# Altium PCB smd.PcbDoc
Units mm, origin at the board's own origin, x right, y up, seen from the top; angles counter-clockwise.
Board outline 50.04 x 50.04 mm, 2 copper layers (Top Layer, Bottom Layer); 16 components, 12 nets, 41 pads, 4 vias.
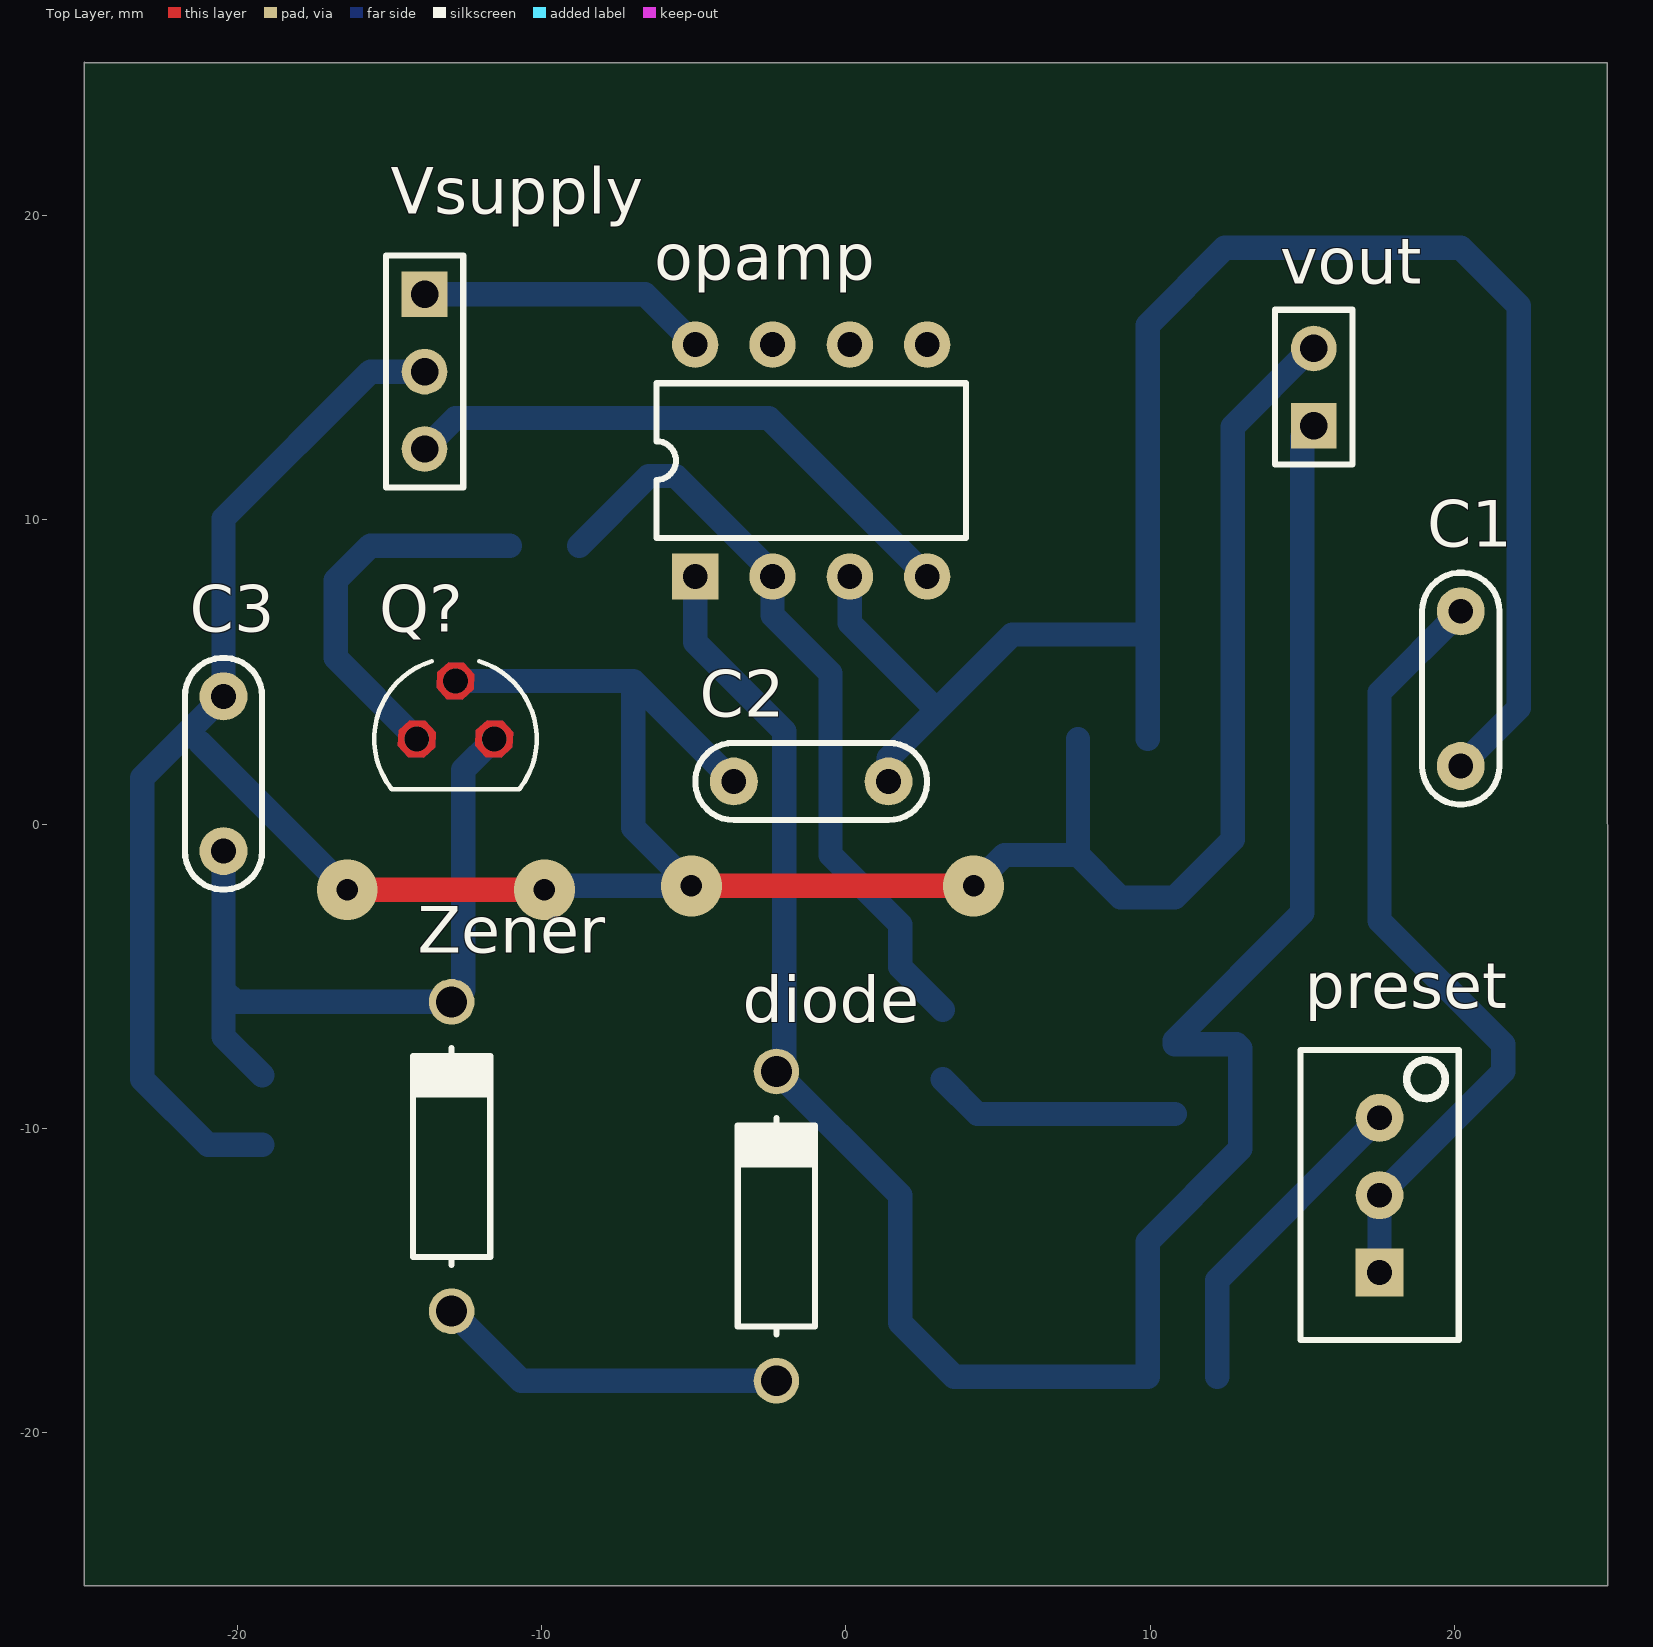
[diagram p0: Top Layer view]
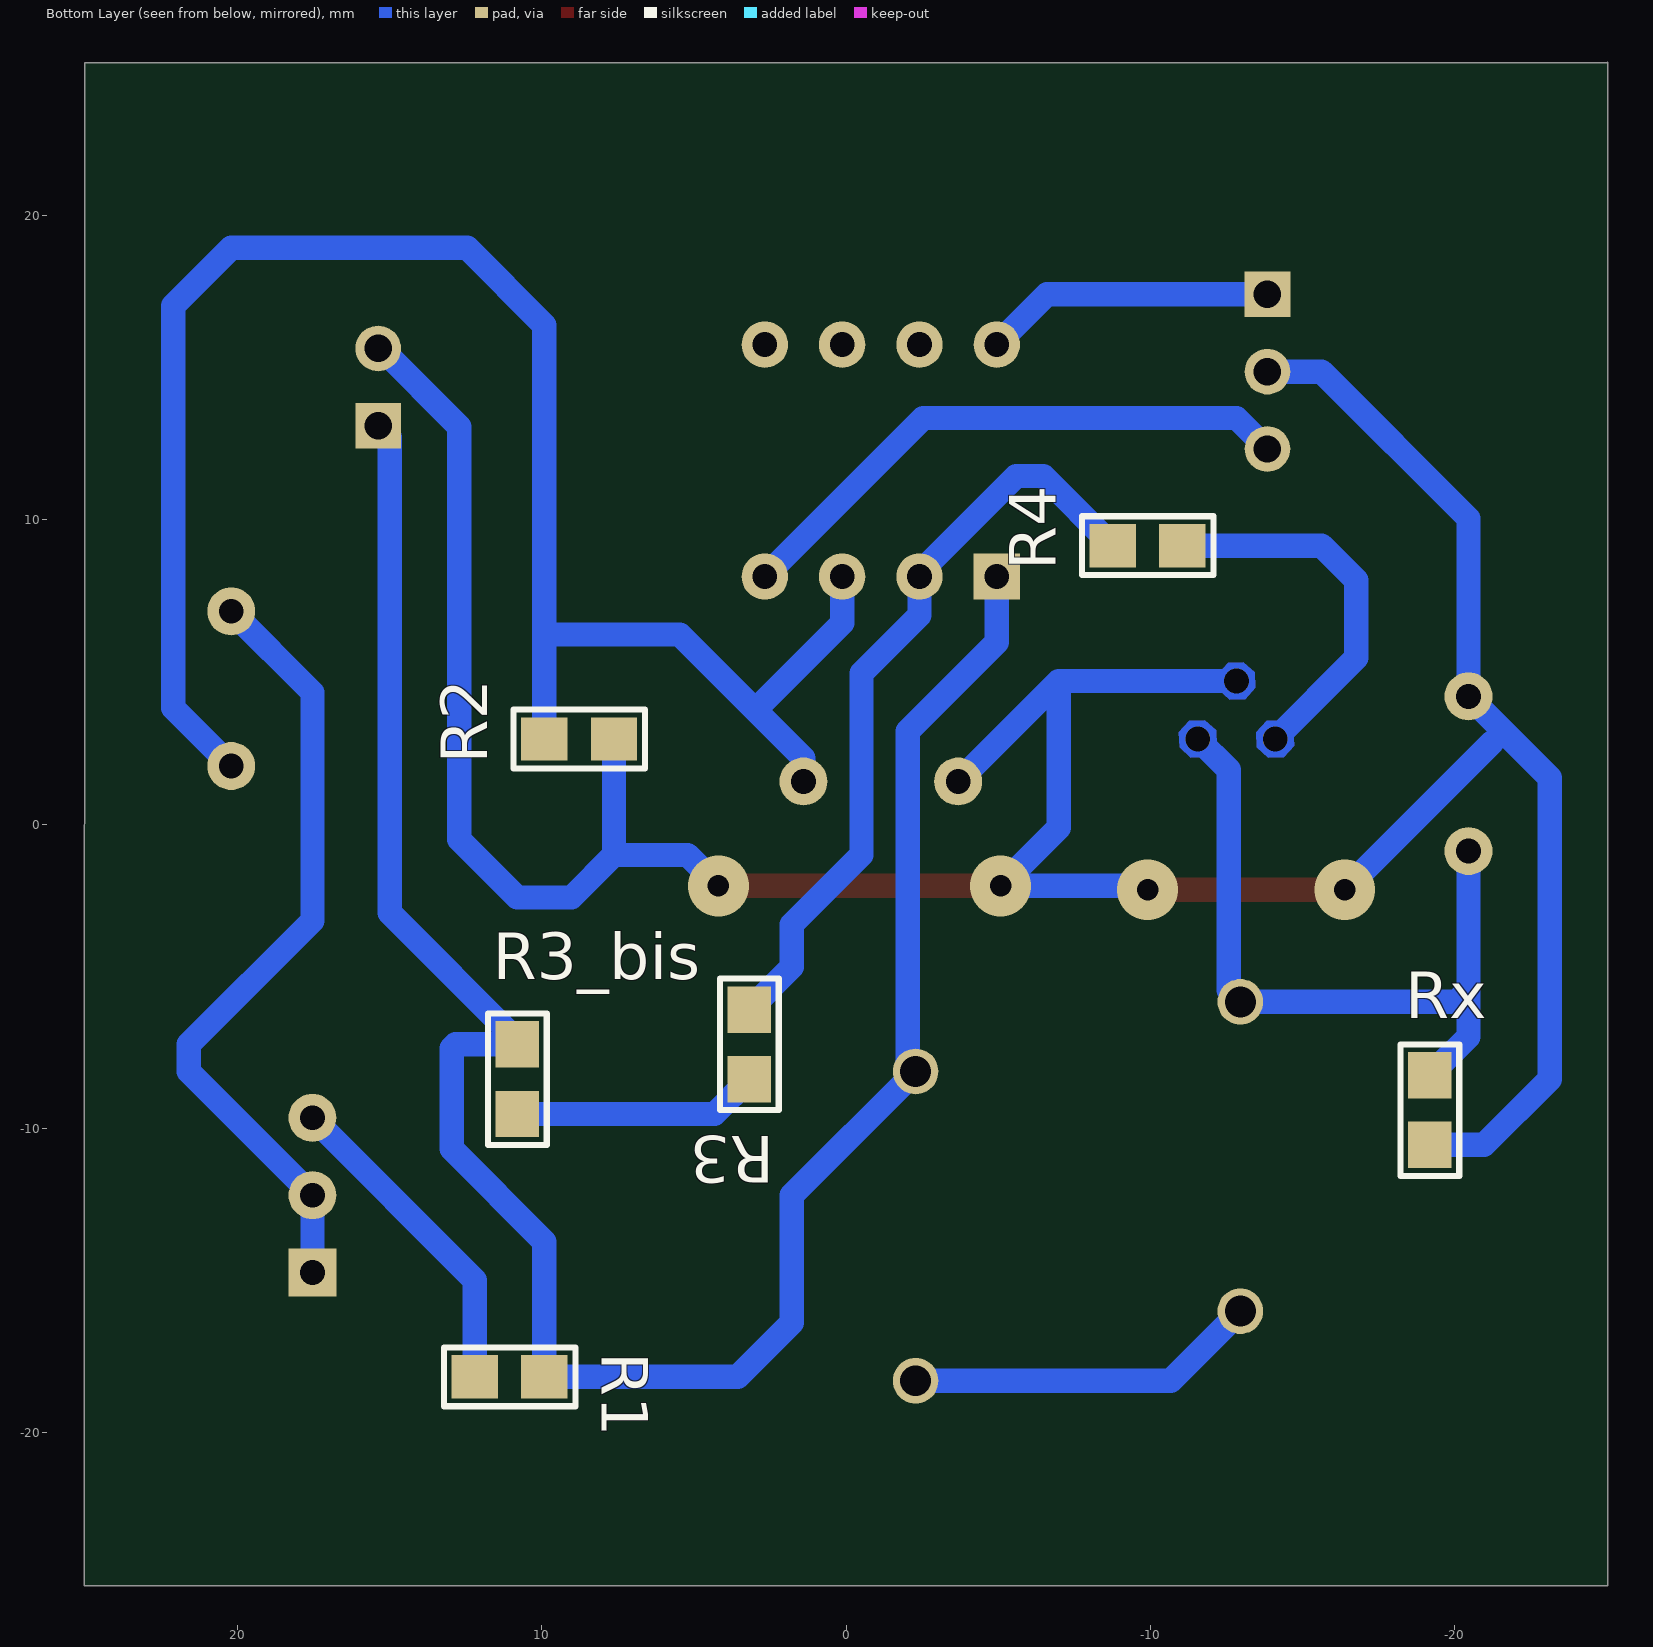
[diagram p1: Bottom Layer view, seen from below]
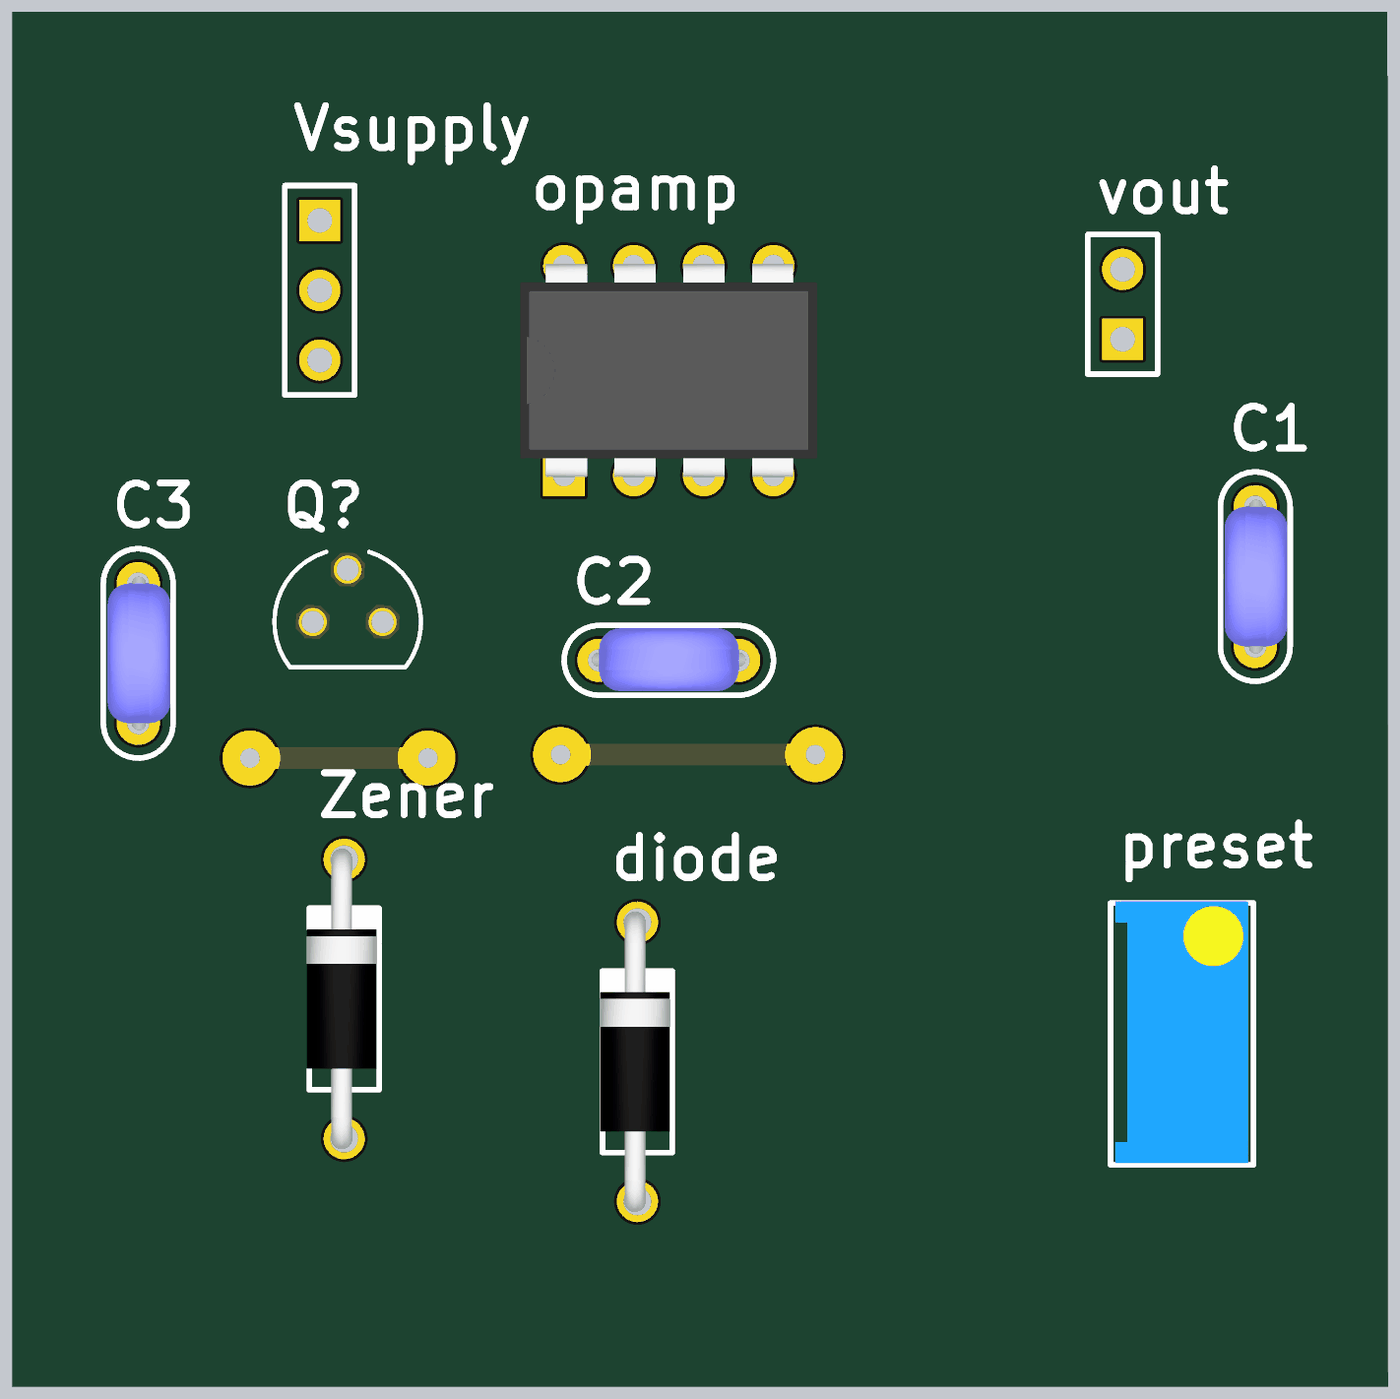
[diagram p2: 3D render of the assembled board from above, using the file's embedded part models]
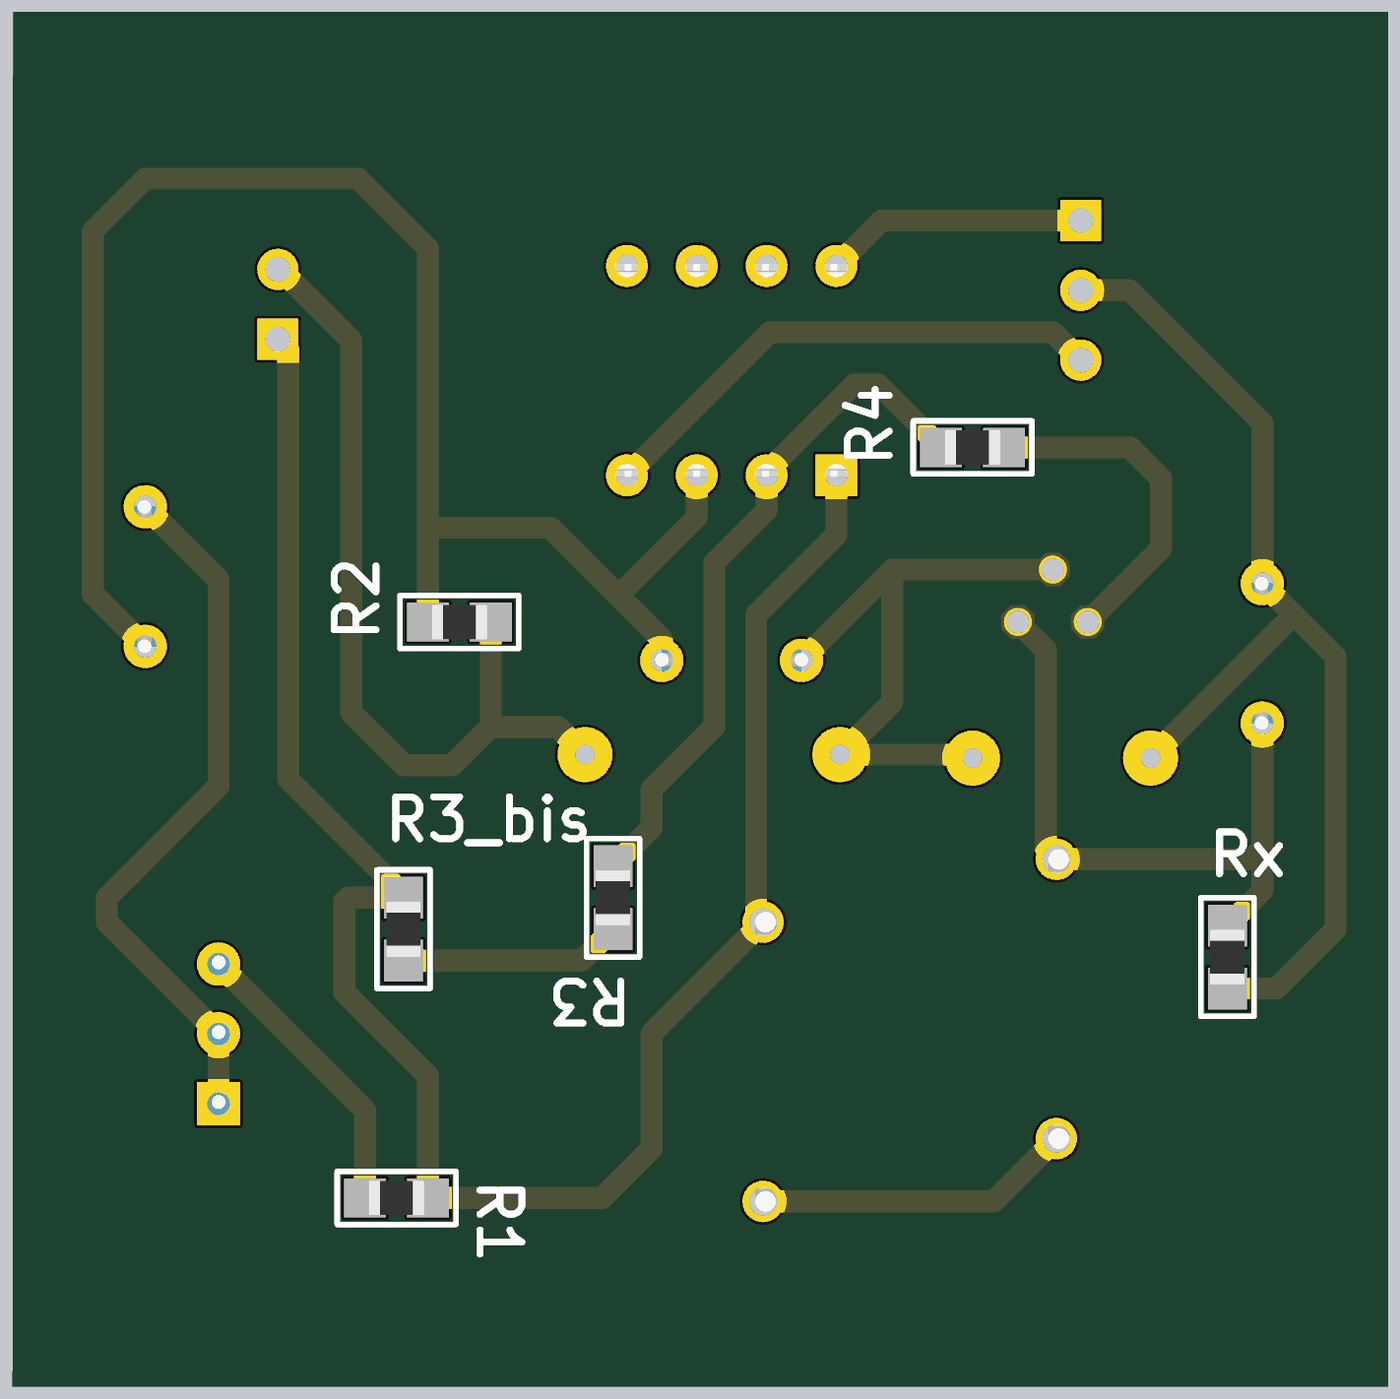
[diagram p3: 3D render of the assembled board from below, using the file's embedded part models]

## Layer stack, top to bottom
Top Solder: solder mask 0.0102, Solder Resist, Dk 3.5
Top Layer: signal copper 0.0356
Dielectric 1: dielectric 0.32, FR-4, Dk 4.8
Bottom Layer: signal copper 0.0356
Bottom Solder: solder mask 0.0102, Solder Resist, Dk 3.5

## Board outline
25.019,-25.019 -25.019,-25.019 -25.019,25.019 -25,25 25,25

## Design rules (kind name [scope] priority, off if disabled: settings)
Clearance [All] p1: gap=0.4 ignorepadtopadclearanceinfootprint=FALSE
PolygonConnect [All] p1: connectstyle=Relief reliefconductorwidth=0.254 reliefentries=4 polygonreliefangle="90 Angle" airgapwidth=0.254
RoutingVias [All] p1: holewidth=0.4 width=2 viastyle="Through Hole" minholewidth=0.4 minwidth=2 maxholewidth=0.4 maxwidth=2
SolderMaskExpansion [All] p1: expansion=0.102
Width [All] p1: maxlimit=0.9 minlimit=0.8 preferedwidth=0.9
30 further rules are at their usual default settings.

## Components (designator, comment, footprint, x,y, rotation, side; value= is the part's Value field where it differs from the comment)
C1 "CAP" CAP200 20.193,4.445 r90 top
C2 "CAP" CAP200 -1.143,1.397 r180 top
C3 "CAP" CAP200 -20.447,1.651 r90 top
diode "DIODO" DO41 -2.286,-13.208 r90 top
opamp "LM833" DIP8 -4.953,8.128 r90 top
preset "PRESET" "PRESET V" 17.526,-12.192 r90 top
Q? "MPF102" TO92F -12.827,2.794 r0 top
R1 "RES" 0805 11.049,-18.161 r180 bottom
R2 "RES" 0805 8.763,2.794 r0 bottom
R3 "RES" 0805 3.175,-7.239 r270 bottom
R3_bis "RES" 0805 10.795,-8.382 r90 bottom
R4 "RES" 0805 -9.906,9.144 r0 bottom
Rx "RES" 0805 -19.177,-9.398 r90 bottom
vout "vout" HDR1X2 15.367,13.081 r90 top
Vsupply "Header 3" HDR1X3 -13.843,17.399 r270 top
Zener "DIODO ZENER" DO41 -12.954,-10.922 r90 top

## Footprints (in the part's own frame and the unit in brackets; to place one, negate y for a bottom-side part, rotate by r counter-clockwise, add the part's x,y. Pads: shape width x height; smd on the part's side, far side on the other; paste and mask are expansions set on the pad)
0805 [mil] "Pasivo 0805"
  rect 60x56 smd: 1(-45,0) 2(45,0)
  silkscreen extent -85,-38 85,38, body extent -39,-25 39,25, height 15
CAP200 [mil]
  round 62 hole 32: 1(-100,0) 2(100,0)
  silkscreen extent -150,-50 150,50, body extent -110,-46 110,44, height 246
DIP8 [mil]
  rect 60x60 hole 32: 1(0,0)
  round 60 hole 32: 2(0,-100) 3(0,-200) 4(0,-300) 5(300,-300) 6(300,-200) 7(300,-100) 8(300,0)
  silkscreen extent 50,-350 250,50, body extent -3,-363 303,63, height 177
DO41 [mm]
  round 1.5 hole 1.016: 1(-5.08,0) 2(5.08,0)
  silkscreen extent -3.56,-1.27 3.56,1.27, body extent -5.46,-1.19 5.46,1.37, height 2.03
HDR1X2 [mm] "Connector; Header; 2 Position"
  rect 1.5x1.5 hole 0.9: 1(0,0)
  round 1.5 hole 0.9: 2(2.54,0)
  silkscreen extent -1.27,-1.27 3.81,1.27
HDR1X3 [mm] "Connector; Header; 3 Position"
  rect 1.5x1.5 hole 0.9: 1(0,0)
  round 1.5 hole 0.9: 2(2.54,0) 3(5.08,0)
  silkscreen extent -1.27,-1.27 6.35,1.27
"PRESET V" [mil]
  rect 62x62 hole 32: 1(-100,0)
  round 62 hole 32: 2(0,0) 3(100,0)
  silkscreen extent -188,-102 188,102, body extent -185,-95 190,95, height 455
TO92F [mil]
  round 32 hole 32: 1(-50,0) 2(0,75) 3(50,0)
  Top Layer region: -25.57,8.89 -39.01,23.56 -58.89,24.43 -73.56,10.99 -74.43,-8.89 -60.99,-23.56 -41.11,-24.43 -26.44,-10.99
  Top Layer region: 24.43,83.89 10.99,98.56 -8.89,99.43 -23.56,85.99 -24.43,66.11 -10.99,51.44 8.89,50.57 23.56,64.01
  Top Layer region: 74.43,8.89 60.99,23.56 41.11,24.43 26.44,10.99 25.57,-8.89 39.01,-23.56 58.89,-24.43 73.56,-10.99
  Bottom Layer region: -25.57,8.89 -39.01,23.56 -58.89,24.43 -73.56,10.99 -74.43,-8.89 -60.99,-23.56 -41.11,-24.43 -26.44,-10.99
  Bottom Layer region: 24.43,83.89 10.99,98.56 -8.89,99.43 -23.56,85.99 -24.43,66.11 -10.99,51.44 8.89,50.57 23.56,64.01
  Bottom Layer region: 74.43,8.89 60.99,23.56 41.11,24.43 26.44,10.99 25.57,-8.89 39.01,-23.56 58.89,-24.43 73.56,-10.99
  Multi-Layer region: -25.57,8.89 -39.01,23.56 -58.89,24.43 -73.56,10.99 -74.43,-8.89 -60.99,-23.56 -41.11,-24.43 -26.44,-10.99
  Multi-Layer region: 24.43,83.89 10.99,98.56 -8.89,99.43 -23.56,85.99 -24.43,66.11 -10.99,51.44 8.89,50.57 23.56,64.01
  Multi-Layer region: 74.43,8.89 60.99,23.56 41.11,24.43 26.44,10.99 25.57,-8.89 39.01,-23.56 58.89,-24.43 73.56,-10.99
  silkscreen extent -105,-65 105,100

## Part data
opamp: "Dual Audio Operational Amplifier"
Q?: Package=None, Availability=Unavailable, MF="Freescale Semiconductor", MP=MPF102, Price=None, SnapEDA_Link=https://www.snapeda.com/parts/MPF102/Freescale%20Semiconductor/view-part/?ref=snap
vout: library part "Header 2", "Header, 2-Pin", LatestRevisionDate=17-Jul-2002, LatestRevisionNote="Re-released for DXP Platform.", Publisher="Altium Limited"
Vsupply: "Header, 3-Pin", LatestRevisionDate=17-Jul-2002, LatestRevisionNote="Re-released for DXP Platform.", Publisher="Altium Limited"

## Via types
v1: diameter 2, hole 0.711, Top Layer to Bottom Layer, 4 vias

## Nets (pads, with @x,y where several pads share a name; then routed paths per layer and width w, separated by ;. In a path a pad name is that pad's centre, name@x,y a point inside that pad or via, vN(x,y) a via of type N, cw(c..) or ccw(c..) an arc to the next point about the centre after c; other vN are vias at no path point)
GND: C2.2 C3.2 Q?.2 R2.1 Rx.1 vout.2 Vsupply.2 | length 109.8
  Top Layer w0.8: v1(-16.383,-2.159) v1(-9.906,-2.159) ; v1(-5.08,-2.032) v1(4.191,-2.032)
  Bottom Layer w0.8: -21.209,2.667 v1(-16.383,-2.159) ; Rx.1 -20.955,-10.541 -23.114,-8.382 -23.114,1.524 C3.2 -20.447,10.033 -15.621,14.859 Vsupply.2 ; Q?.2 -6.985,4.699 ; v1(-9.906,-2.159) -9.779,-2.032 v1(-5.08,-2.032) -6.985,-0.127 -6.985,4.699 ; C2.2 -6.985,4.699 ; v1(4.191,-2.032) 5.207,-1.016 7.62,-1.016 ; R2.1 7.62,-1.016 ; vout.2 15.276,15.621 12.7,13.045 12.7,-0.508 10.795,-2.413 9.017,-2.413 7.62,-1.016
NetC1_1: C1.1 C2.1 opamp.3 R2.2 | length 60
  Bottom Layer w0.8: opamp.3 0.127,6.604 2.984,3.746 ; C2.1 1.397,2.159 2.984,3.746 ; R2.2 9.906,6.223 ; C1.1 22.098,3.81 22.098,17.018 20.193,18.923 12.446,18.923 9.906,16.383 9.906,6.223 ; 2.984,3.746 5.461,6.223 9.906,6.223
NetC1_2: C1.2 preset.1 preset.2 | length 26.2
  Bottom Layer w0.8: preset.1 preset.2 21.59,-8.128 21.59,-7.239 17.526,-3.175 17.526,4.318 C1.2
NetC3_1: C3.1 Q?.3 Rx.2 Zener.2 | length 24.8
  Bottom Layer w0.8: C3.1 -20.447,-5.461 ; Rx.2 -20.447,-6.985 -20.447,-5.461 ; Q?.3 -12.573,1.778 -12.573,-5.461 Zener.2 -20.066,-5.842 -20.447,-5.461
Netdiode_1: diode.1 Zener.1 | length 11.6
  Bottom Layer w0.8: Zener.1 -10.668,-18.288 diode.1
Netdiode_2: diode.2 opamp.1 R1.2 R3_bis.2 vout.1 | length 72.9
  Bottom Layer w0.8: opamp.1 -4.953,5.969 -2.032,3.048 -2.032,-7.874 diode.2 1.778,-12.192 1.778,-16.383 3.556,-18.161 R1.2 9.906,-13.716 12.954,-10.668 12.954,-7.366 12.827,-7.239 R3_bis.2 10.795,-7.112 14.986,-2.921 14.986,12.7 vout.1
Netopamp_2: opamp.2 R3.1 R4.2 | length 25.3
  Bottom Layer w0.8: R4.2 -6.477,11.43 -5.588,11.43 -2.413,8.255 opamp.2 -2.413,6.858 -0.508,4.953 -0.508,-1.016 1.778,-3.302 1.778,-4.699 R3.1
Netpreset_3: preset.3 R1.1 | length 10.7
  Bottom Layer w0.8: R1.1 12.192,-14.986 preset.3
NetQ?_1: Q?.1 R4.1 | length 12.5
  Bottom Layer w0.8: Q?.1 -16.764,5.461 -16.764,8.001 -15.621,9.144 R4.1
NetR3_2: R3.2 R3_bis.1 | length 8.1
  Bottom Layer w0.8: R3.2 4.318,-9.525 R3_bis.1
Vcc+: opamp.8 Vsupply.1 | length 9.6
  Bottom Layer w0.8: Vsupply.1 -6.604,17.399 opamp.8
Vcc-: opamp.4 Vsupply.3 | length 19.1
  Bottom Layer w0.8: Vsupply.3 -12.827,13.335 -2.54,13.335 opamp.4
pads on no net: opamp.5 opamp.6 opamp.7